# Altium PCB COIL-BOOST-10A.PcbDoc (part 5 of 5)
Units mm, origin at the board's own origin, x right, y up, seen from the top; angles counter-clockwise.
Board outline 80.1 x 100.1 mm, 4 copper layers (L1, L2, L3, L4), stack 1.512 mm thick; 282 components, 151 nets, 786 pads, 740 vias.
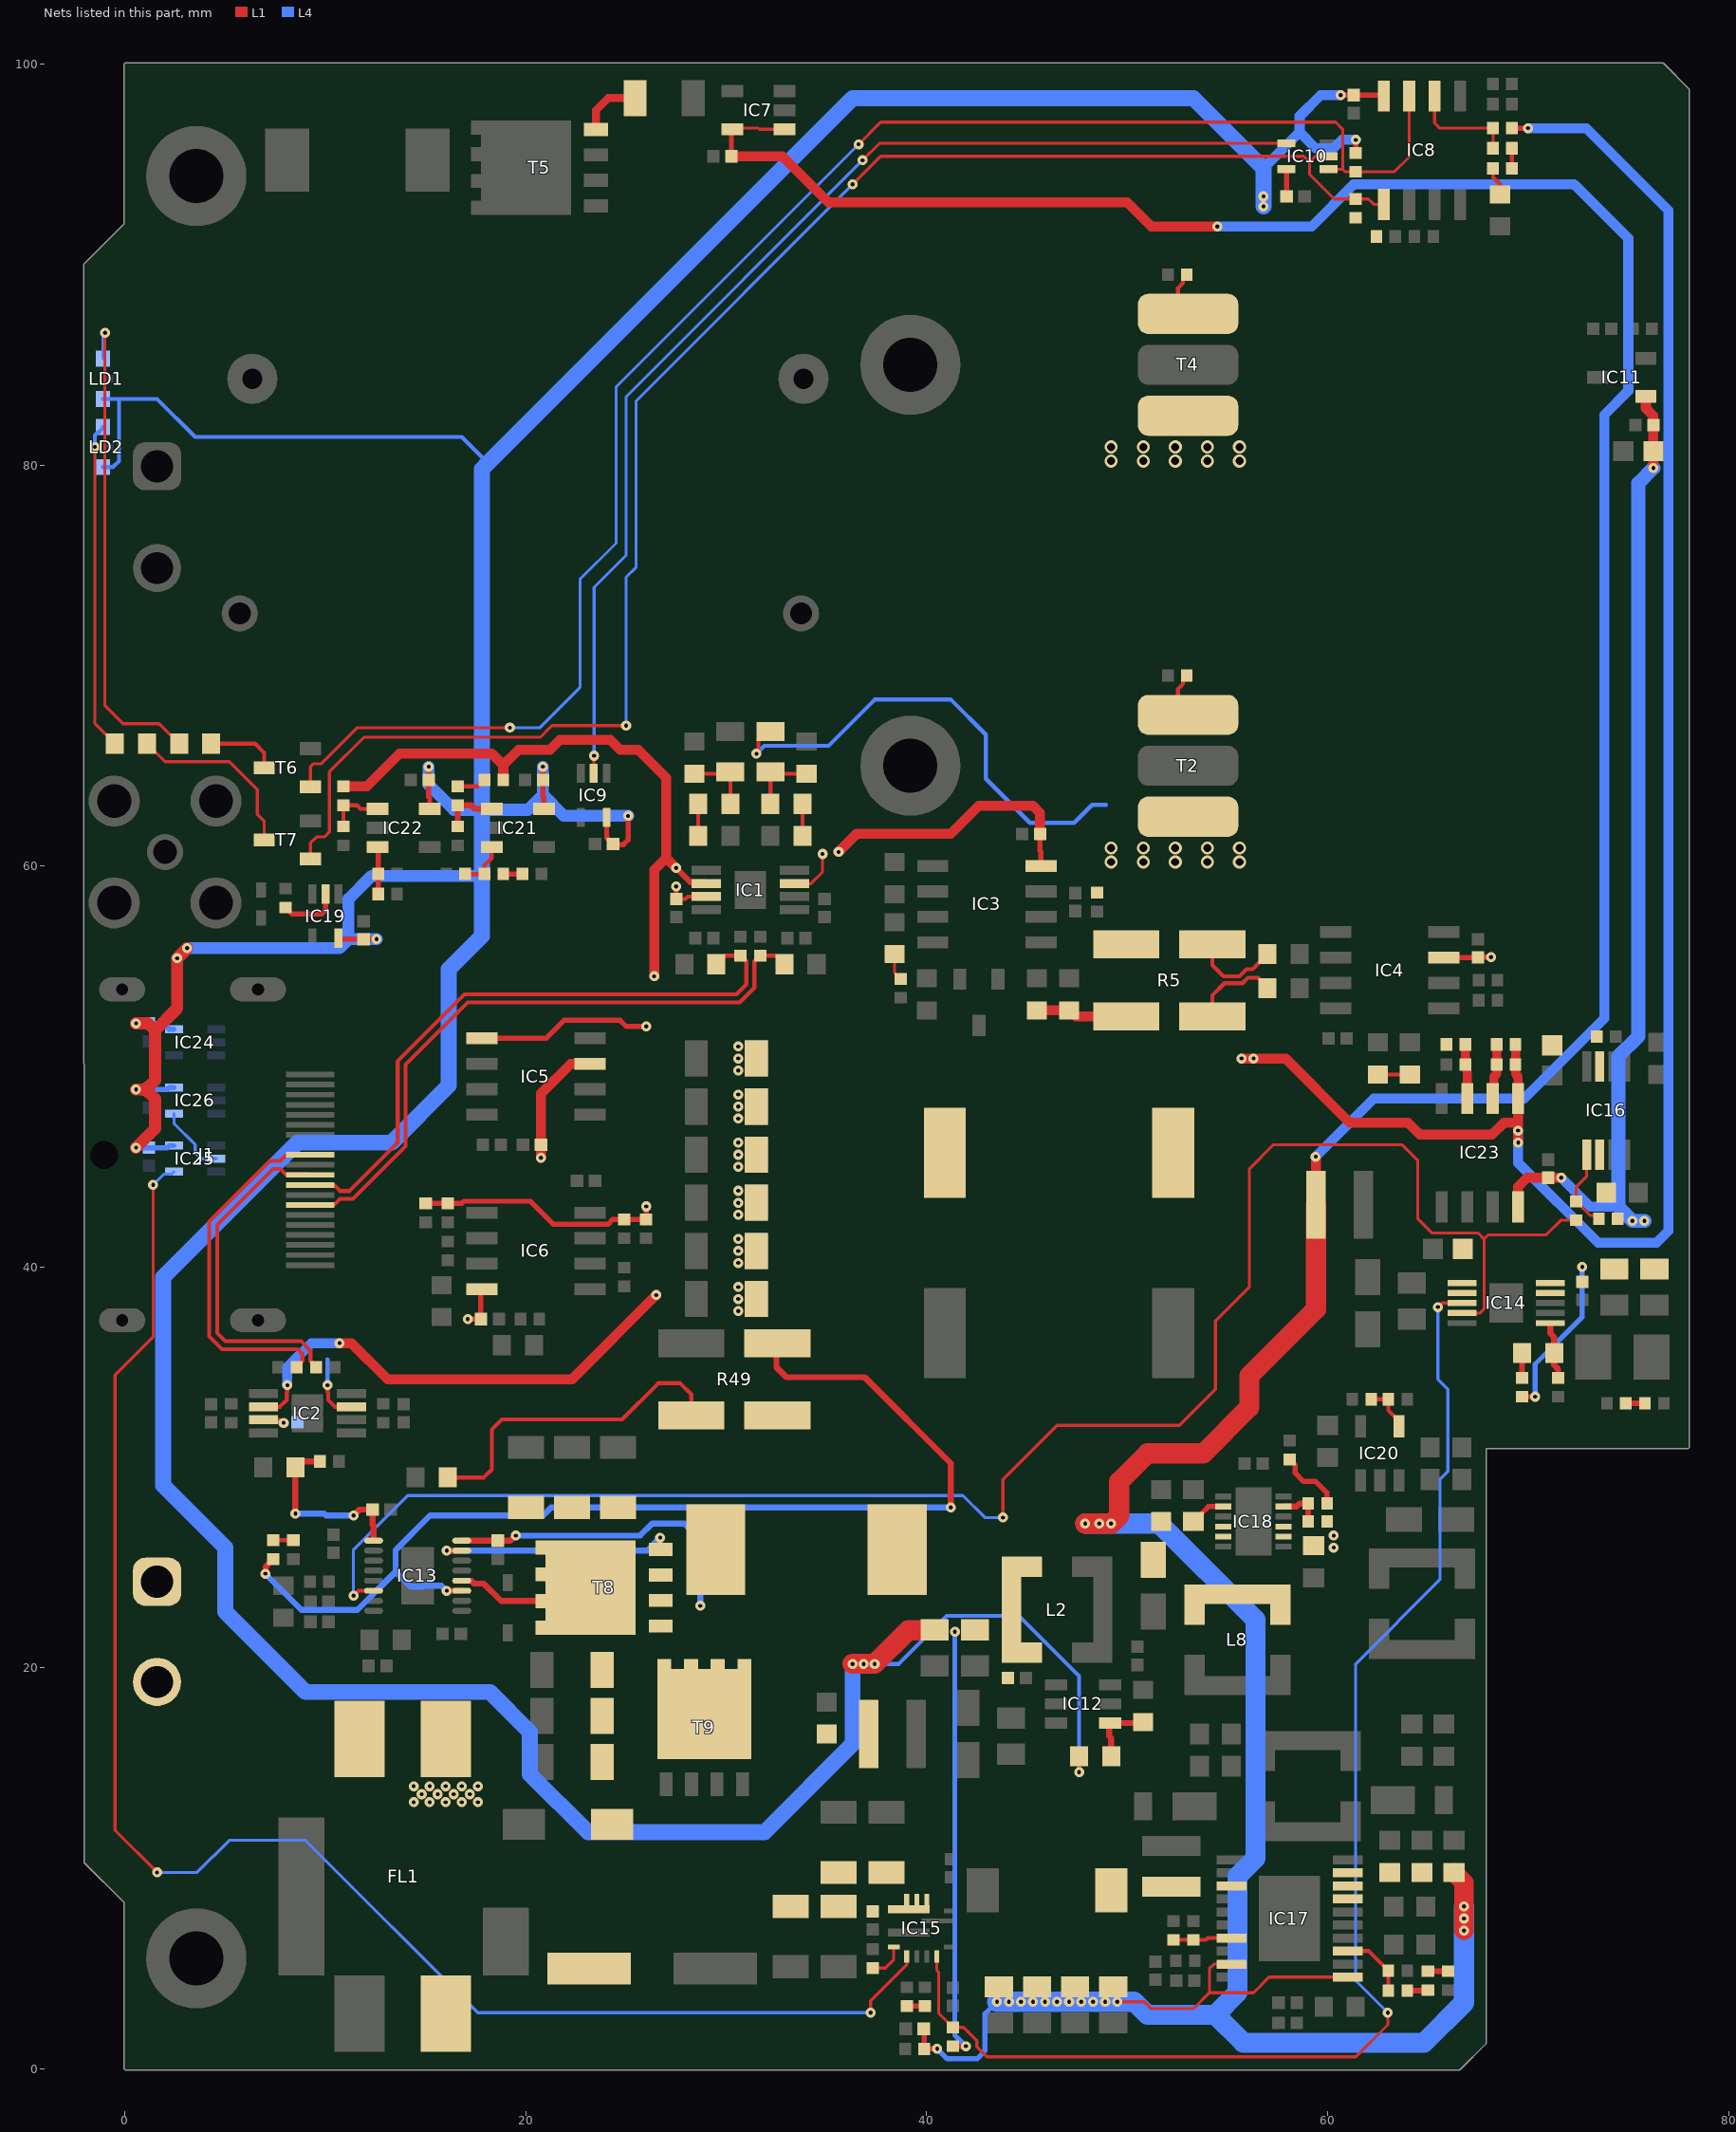
[diagram p5: the nets of this part, all layers, seen from the top]

## Via types
v1: diameter 0.5, hole 0.2, L1 to L4, tented both sides, 720 vias
v2: diameter 0.65, hole 0.4, L1 to L4, tented both sides, 20 vias

## Nets (pads, with @x,y where several pads share a name; then routed paths per layer and width w, separated by ;. In a path a pad name is that pad's centre, name@x,y a point inside that pad or via, vN(x,y) a via of type N, cw(c..) or ccw(c..) an arc to the next point about the centre after c; other vN are vias at no path point) (continued)
NetIC8_6: IC8.6 R32.1 R33.2 | length 5.4
  L1 w0.15: IC8.6@65.335,98.4 65.335,97.065 65.6,96.8 R32.1@68.25,96.8 R33.2@68.25,95.8
NetIC9_2: IC9.2 IC10.4 | length 57.6
  L1 w0.15: IC9.2@23.379,64.625 23.385,64.631 23.385,65.485 v1(23.4,65.5) ; v1(36.8,95.2) 37.65,96.05 IC10.4@57.95,96.05
  L4 w0.15: v1(23.4,65.5) 23.4,73.9 25,75.5 25,83.4 v1(36.8,95.2)
NetIC12_4: IC12.4 R46.1 R47.2 | length 3.4
  L1 w0.3: R46.1@49.2,15.6 49.2,16.5 49.1,16.6 49.1,17.2 IC12.4@49.15,17.25 50.75,17.25 R47.2@50.8,17.3
NetIC14_1: IC14.1 IC14.2 L4.2
NetIC14_6: IC14.6 R52.2 R53.1 | length 2.9
  L1 w0.3: IC14.6@71.1,37.2 71.1,36.7 71.3,36.5 R53.1@71.3,35.7 71.3,35.1 71.5,34.9 R52.2@71.5,34.47
NetIC15_10: IC15.10 R62.2 | length 1.9
  L1 w0.15: R62.2@37.3,5.03 37.93,5.03 38.35,5.45 IC15.10@38.35,6.08
NetIC16_1: IC16.1 R58.1 R60.2 | length 4
  L1 w0.15: R58.1@72.4,43.27 72.4,44 72.925,44.525 IC16.1@72.925,45.6 ; R58.1@72.42,43.27 72.635,43.055 72.635,43.035 73.103,42.567 73.363,42.567 R60.2@73.53,42.4
NetIC17_3: IC17.3 L7.1
NetIC17_7: IC17.7 R64.1 R69.2 | length 2.9
  L1 w0.2: R64.1@52.3,6.43 R69.2@53.3,6.43 53.93,6.43 54.025,6.525 IC17.7@55.2,6.525
NetIC17_13: IC17.13 R71.1 R72.1 | length 3.4
  L1 w0.2: IC17.13@61,5.875 62.055,5.875 62.82,5.11 62.84,5.11 63.03,4.92 R71.1@63.03,4.9 R72.1@63.03,3.9
NetIC18_5: IC18.5 R65.1 R70.2 | length 2.2
  L1 w0.3: IC18.5@57.8,28.05 58.45,28.05 58.6,28.2 R70.2@59.03,28.2 R65.1@59.03,27.3
NetIC19_2: IC19.2 R90.1 | length 3
  L1 w0.254: R90.1@8,57.93 8.02,57.93 8.183,57.767 8.183,57.749 8.332,57.6 9.8,57.6 10,57.8 IC19.2@10,58.6
NetIC20_4: IC20.4 R75.1 R76.2 | length 2.4
  L1 w0.2: R75.1@62.17,33.4 R76.2@63.03,33.4 63.03,32.845 63.55,32.325 IC20.4@63.55,32.05
NetIC21_1: IC21.1 R79.1 R80.2 | length 2.8
  L1 w0.3: R80.2@16.6,61.97 R79.1@16.6,63.03 17.27,63.03 17.45,62.85 IC21.1@18.3,62.85
NetIC21_3: IC21.3 R78.1 R91.2 | length 2.5
  L1 w0.2: R78.1@16.97,59.6 R91.2@17.93,59.6 17.93,60.03 18.3,60.4 IC21.3@18.3,60.95
NetIC22_1: IC22.1 R83.1 R84.2 | length 2.8
  L1 w0.2: R84.2@10.9,61.97 R83.1@10.9,63.03 11.57,63.03 11.75,62.85 IC22.1@12.6,62.85
NetIC22_3: IC22.3 R81.2 R82.1 | length 2.4
  L1 w0.25: IC22.3@12.6,60.95 12.63,60.92 R82.1@12.63,59.6 R81.2@12.63,58.6
NetIC23_2: IC23.2 R85.2 R86.2 | length 2.8
  L1 w0.45: IC23.2@68.235,48.4 68.3,48.465 68.3,49.5 68.43,49.63 R85.2@68.43,50.1 R86.2@68.43,51.1
NetIC23_3: IC23.3 R87.1 R89.2 | length 2.7
  L1 w0.45: R87.1@66.87,51.1 R89.2@66.87,50.1 66.935,50.035 66.935,49.781 66.965,49.751 IC23.3@66.965,48.4
NetIC25_2: IC25.2 IC26.4 | length 3.6
  L4 w0.15: IC26.4@2.45,47.65 2.45,47.15 3.5,46.1 3.5,45.7 3.8,45.4 IC25.2@4.55,45.4
NetL5_2: L5.2 R49.I2
NetLD1_1: LD1.1 R44.2 | length 24.5
  L1 w0.15: v1(-1,86.6) -1,68 -0.1,67.1 1.7,67.1 2.275,66.525 2.325,66.525 2.7,66.15 R44.2@2.7,66.1
  L4 w0.15: LD1.1@-1.1,85.3 -1.1,86.405 -1,86.505 v1(-1,86.6)
NetLD2_1: LD2.1 R45.2 | length 16.4
  L1 w0.15: v1(-1.5,80.9) -1.5,67.1 -0.925,66.525 -0.875,66.525 -0.5,66.15 R45.2@-0.5,66.1
  L4 w0.2: v1(-1.5,80.9) -1.5,81.483 -1.383,81.6 -1.35,81.6 -1.1,81.85 LD2.1@-1.1,81.9
NetR3_1: R3.1 R5.I2 R12.2 T2.3 T4.3 | length 24.3
  L1 w0.2: v1(31.5,65.6) 31.5,65.681 31.6,65.782 31.6,66.325 31.975,66.7 R3.1@32.2,66.7
  L4 w0.2: v1(31.5,65.6) 31.9,66 35.1,66 37.4,68.3 41.2,68.3 42.95,66.55 42.95,64.35 45.1,62.2 45.15,62.15 47.345,62.15 47.395,62.2 48.247,63.053 48.947,63.053
  other v2: 49.2,60.2 50.8,60.2 52.4,60.2 54,60.2 55.6,60.2 49.2,60.9 50.8,60.9 52.4,60.9 54,60.9 55.6,60.9 49.2,80.2 50.8,80.2 52.4,80.2 54,80.2 55.6,80.2 49.2,80.9 50.8,80.9 52.4,80.9 54,80.9 55.6,80.9
NetR3_2: R3.2 R15.2 R25.1 | length 3.4
  L1 w0.2: R25.1@32.2,63.1 R3.2@32.2,64.7 32.3,64.6 R15.2@34,64.6
NetR4_1: R4.1 R5.V2 | length 4.5
  L1 w0.2: R5.V2@54.25,56.1 54.25,55.05 54.8,54.5 55.6,54.5 55.95,54.85 56.25,54.85 56.6,55.2 56.65,55.2 57,55.55 R4.1@57,55.6
NetR5_V1: R5.V1 R10.1 | length 4.4
  L1 w0.2: R5.V1@54.25,52.5 54.25,53.55 54.85,54.15 55.75,54.15 56.02,54.42 56.53,54.42 56.65,54.3 57,53.95 R10.1@57,53.9
NetR6_1: R6.1 R8.1 | length 1.6
  L1 w0.2: R6.1@62.5,49.6 R8.1@64.1,49.6
NetR20_2: R20.2 T4.1 | length 2.8
  L1 w0.2: T4.1@51.354,87.54 51.667,87.54 52.537,88.41 52.537,88.837 52.78,89.08 52.78,89.31 R20.2@52.97,89.5
NetR22_2: R22.2 T2.1 | length 2.8
  L1 w0.2: T2.1@51.354,67.54 51.667,67.54 52.537,68.41 52.537,68.837 52.78,69.08 52.78,69.31 R22.2@52.97,69.5
NetR23_2: R23.2 R24.1 | length 1.4
  L1 w0.15: R24.1@38.4,55.6 38.4,54.67 38.465,54.605 38.465,54.585 38.68,54.37 R23.2@38.7,54.37
NetR25_2: R25.2 R57.1 | length 1.6
  L1 w0.2: R57.1@33.8,61.5 R25.2@33.8,63.1
NetR33_1: R33.1 R34.2 | length 1
  L1 w0.2: R34.2@69.19,94.8 R33.1@69.19,95.8
NetR34_1: R34.1 R37.2 | length 1.4
  L1 w0.2: R34.1@68.25,94.8 68.25,94.35 68.6,94 R37.2@68.6,93.5
NetR36_2: R36.2 T5.4 | length 3.2
  L1 w0.4: T5.4@23.5,96.74 23.5,97.7 24.1,98.3 R36.2@25.45,98.3
NetR44_1: R44.1 T6.3 | length 3.6
  L1 w0.2: R44.1@4.3,66.1 6.5,66.1 6.95,65.65 T6.3@6.95,64.9
NetR45_1: R45.1 T7.3 | length 9.1
  L1 w0.15: R45.1@1.1,66.1 1.1,66.05 1.475,65.675 1.525,65.675 2,65.2 5.2,65.2 6.6,63.8 6.6,62.575 6.95,62.225 T7.3@6.95,61.3
NetR49_V2: R49.V2 R55.2 | length 16.5
  L1 w0.2: R55.2@16.1,29.5 17.9,29.5 18.3,29.9 18.3,31.9 18.8,32.4 24.8,32.4 26.6,34.2 27.7,34.2 28.25,33.65 R49.V2@28.25,32.6
NetR50_2: R50.2 R51.1 | length 1
  L1 w0.3: R50.2@74.87,33.2 R51.1@75.83,33.2
NetR53_2: R53.2 R54.1 | length 1.2
  L1 w0.3: R54.1@69.7,34.47 R53.2@69.7,35.7
NetR61_1: R61.1 R63.2 | length 0.9
  L1 w0.254: R61.1@39,3.13 R63.2@39.9,3.13
NetR70_1: R70.1 R93.2 | length 3.3
  L1 w0.254: R93.2@58.1,30.4 58.382,30.118 58.382,29.718 58.8,29.3 59.4,29.3 59.97,28.73 R70.1@59.97,28.2
NetR72_2: R72.2 R73.2 | length 0.9
  L1 w0.3: R72.2@64.07,3.9 64.97,3.9 R73.2@65,3.93
NetR73_1: R73.1 R74.2 | length 1
  L1 w0.3: R73.1@65,4.87 R74.2@66,4.87
NetR77_2: R77.2 R91.1 | length 1
  L1 w0.25: R91.1@18.87,59.6 R77.2@19.83,59.6
NetR79_2: R79.2 R92.1 | length 1.5
  L1 w0.2: R79.2@16.6,63.97 17.6,63.97 17.72,64.09 17.74,64.09 17.93,64.28 R92.1@17.93,64.3
NetR94_1: R94.1 R96.2 R97.2 | length 3.4
  L1 w0.2: R97.2@28.4,64.6 30.1,64.6 R96.2@30.2,64.7 R94.1@30.2,63.1
NetR94_2: R94.2 R95.1 | length 1.6
  L1 w0.2: R95.1@28.6,61.5 R94.2@28.6,63.1
NetR106_2: R106.2 R107.1 | length 1
  L1 w0.2: R107.1@7.4,26.37 R106.2@8.4,26.37
OCP: IC8.7 IC10.1 R35.1 T6.1 | length 83.1
  L1 w0.15: T6.1@9.25,63.95 9.25,64.95 9.4,65.1 9.8,65.1 11.6,66.9 v1(19.2,66.9) ; v1(36.6,96) 37.7,97.1 60.4,97.1 60.75,96.75 60.75,94.75 ; IC10.1@60.05,94.75 60.75,94.75 ; IC8.7@64.065,98.4 64.065,95.365 63.33,94.63 R35.1@61.4,94.63 60.87,94.63 60.8,94.7 60.75,94.75
  L4 w0.15: v1(19.2,66.9) 20.7,66.9 22.7,68.9 22.7,74.3 24.5,76.1 24.5,83.9 v1(36.6,96)
OVERTEMP: IC8.1 IC10.2 R42.1 T7.1 | length 81.9
  L1 w0.15: T7.1@9.25,60.35 9.25,61.15 9.55,61.45 9.95,61.45 10.2,61.7 10.2,64.7 11.925,66.425 20.725,66.425 21.3,67 v1(25,67) ; v1(36.3,94) 37.7,95.4 58.8,95.4 59.1,95.1 ; IC10.2@60.05,95.4 59.4,95.4 59.1,95.1 ; IC8.1@62.795,93 62.3,93 62.03,93.27 R42.1@61.4,93.27 60.33,93.27 59.1,94.5 59.1,95.1
  L4 w0.15: v1(25,67) 25,74.4 25.5,74.9 25.5,83.2 v1(36.3,94)
P2V5_REF: IC1.2 IC2.2 IC5.1 IC23.1 R11.1 R14.1 R29.1 R31.1 R32.2 R83.2 R85.1 R86.1 R92.2 | length 169
  L1 w0.2: IC2.2@6.9,33.025 7.725,33.025 8.065,33.365 8.065,33.749 8.1,33.784 v1(8.1,34.1)
  L1 w0.254: R29.1@15,43.17 R31.1@16.1,43.17 16.798,43.17 16.91,43.282 20.218,43.282 21.372,42.128 24.09,42.128 24.332,42.37 R14.1@24.9,42.37 R11.1@26,42.37 v1(26,43.02) ; IC5.1@17.8,51.405 21.005,51.405 21.9,52.3 24.7,52.3 25,52 v1(26,52) ; R32.2@69.19,96.8 v1(70,96.8)
  L1 w0.3: v1(27.5,59.9) 28.2,59.2 28.925,59.2 IC1.2@29,59.125
  L1 w0.45: R86.1@69.37,51.1 R85.1@69.37,50.1 69.37,49.63 69.505,49.495 IC23.1@69.505,48.4
  L1 w0.5: v1(10.7,36.2) 11.3,36.2 13.1,34.4 22.3,34.4 v1(26.5,38.6) ; R83.2@10.9,63.97 12.07,63.97 13.7,65.6 18.3,65.6 18.87,65.03 ; R92.2@18.87,64.3 18.87,65.03 ; v1(26.4,54.5) 26.4,59.8 27,60.4 ; v1(27.5,59.9) 27,60.4 ; v1(55.7,50.4) 57.9,50.4 61.1,47.2 64,47.2 64.6,46.6 68.2,46.6 68.8,47.2 69.505,47.2 ; v1(69.505,46.205) 69.505,46.795 v1(69.5,46.8) 69.505,46.805 69.505,47.2 ; IC23.1@69.505,48.4 69.505,47.2 ; 18.87,65.03 19.64,65.8 21.2,65.8 21.7,66.3 24.2,66.3 24.7,65.8 25.6,65.8 27,64.4 27,60.4
  L4 w0.5: v1(8.1,34.1) 8.1,35 9.3,36.2 v1(10.7,36.2) ; v1@69.505,46.8 v1(69.505,46.205) 69.505,45.195 73.5,41.2 76.4,41.2 77,41.8 77,92.7 72.9,96.8 v1(70,96.8)
  other v1: 56.3,50.4
P3V3: C9.2 C24.2 C25.2 C26.2 C40.2 C48.2 C56.2 C98.2 C99.2 C100.2 C101.2 C104.2 IC8.8 IC9.5 IC10.5 IC19.5 IC21.5 IC22.5 IC24.5 IC25.5 IC26.5 L2.2 LD1.2 LD2.2 R35.2 R40.2 R42.2 R46.2 R88.2 | length 304.4
  L1 w0.2: v1(47.6,14.8) R46.2@47.6,15.6
  L1 w0.254: IC19.5@10.65,56.4 10.7,56.35 C48.2@11.9,56.35 v1(12.55,56.35) ; v1(15.15,64.95) 15.15,63.45 15.2,63.4 IC22.5@15.2,62.85 ; v1(20.85,64.95) C98.2@20.85,64.3 20.85,63.45 20.9,63.4 IC21.5@20.9,62.85 ; IC9.5@24.029,62.425 24.029,61.533 24.037,61.525 24.037,61.413 24.384,61.066 24.866,61.066 25.1,61.3 v1(25.1,62.5) ; R88.2@41.3,1.13 v1(41.95,1.13) ; C99.2@57.95,93.4 IC10.5@57.95,94.75 ; v1(60.65,98.45) C100.2@61.3,98.45 62.745,98.45 IC8.8@62.795,98.4 ; R35.2@61.4,95.57 v1(61.4,96.22)
  L1 w0.6: v1(0.55,45.95) 1.5,46.9 1.5,48.39 1.04,48.85 ; v1(0.55,48.85) 1.04,48.85 ; v1(0.55,52.15) 1.149,52.15 1.5,51.799 ; v1(3.1,55.9) v1(2.6,55.4) 2.6,52.899 1.5,51.799 ; 1.04,48.85 1.5,49.31 1.5,51.799
  L1 w1: v1(36.3,20.2) v1(36.85,20.2) v1(37.4,20.2) 39.075,21.875 40.375,21.875 C25.2@40.4,21.9
  L4 w0.2: LD2.2@-1.1,79.9 -0.6,79.9 -0.3,80.2 -0.3,83.3 ; LD1.2@-1.1,83.3 -0.3,83.3 ; 18.1,80.1 16.8,81.4 3.5,81.4 1.6,83.3 -0.3,83.3 ; v1(37.4,20.2) 38.6,20.2 41,22.6 44.6,22.6 47.6,19.6 v1(47.6,14.8)
  L4 w0.254: v1(0.55,45.95) 2.1,45.95 2.2,46.05 IC25.5@2.45,46.05 ; v1(0.55,48.85) C104.2@1.2,48.85 2.1,48.85 2.2,48.95 IC26.5@2.45,48.95 ; v1(0.55,52.15) C40.2@1.2,52.15 1.978,52.15 2.127,52.001 2.127,51.923 2.2,51.85 IC24.5@2.45,51.85 ; v1(41.4,21.8) 41.4,1.68 v1(41.95,1.13)
  L4 w0.5: 56.8,94.8 58.6,96.6 ; v1(60.65,98.45) 59.65,98.45 58.6,97.4 58.6,96.6 ; v1(61.4,96.22) 60.72,96.22 60.3,95.8 59.4,95.8 58.6,96.6
  L4 w0.6: v1(2.6,55.4) v1(3.1,55.9) 10.7,55.9 11.15,56.35 ; v1(12.55,56.35) 11.15,56.35 ; v1(15.15,64.95) 15.15,64.05 16.4,62.8 17.8,62.8 20.1,62.8 20.85,63.55 ; 17.8,59.5 12.3,59.5 11.15,58.35 11.15,56.35 ; v1(20.85,64.95) 20.85,63.55 ; v1(25.1,62.5) 21.9,62.5 20.85,63.55
  L4 w0.8: v1(36.3,20.2) 36.3,16.2 31.9,11.8 23.1,11.8 20.2,14.7 20.2,16.8 18.2,18.8 9,18.8 5,22.8 5,26 1.9,29.1 1.9,39.5 8.6,46.2 13.3,46.2 16.15,49.05 16.15,54.85 17.8,56.5 17.8,59.5 17.8,62.8 17.8,79.8 18.1,80.1 36.3,98.3 53.3,98.3 56.8,94.8 v1(56.8,93.4) v1(56.8,92.9)
P5V0_REF: C77.2 IC16.7 R66.2 R87.2
P5V4_PG: IC13.6 IC14.4 R58.2 | length 89
  L1 w0.15: v1(43.8,27.5) 43.8,29.4 46.5,32.1 52.6,32.1 54.4,33.9 54.4,37.3 56.1,39 56.1,44.9 57.3,46.1 63.7,46.1 64.5,45.3 64.5,42.4 65.2,41.7 67.5,41.7 67.8,41.4 ; IC14.4@66.7,37.7 67.6,37.7 67.8,37.9 67.8,41.4 ; R58.2@72.4,42.33 71.63,42.33 70.9,41.6 68,41.6 67.8,41.4
  L1 w0.2: v1(11.4,23.6) 11.65,23.85 IC13.6@12.4,23.85
  L4 w0.15: v1(11.4,23.6) 11.4,25.9 14.1,28.6 41.8,28.6 42.9,27.5 v1(43.8,27.5)
P5V4A: C10.2 C11.2 C29.2 C30.2 C31.2 C68.2 C102.2 IC11.1 IC14.9 IC14.10 IC16.2 IC23.8 R54.2 R60.1 | length 57.8
  L1 w0.254: R54.2@69.7,33.53 v1(70.35,33.53)
  L1 w0.5: IC23.8@69.505,43 69.505,44.005 69.95,44.45 C102.2@71,44.45 v1(71.65,44.45) ; IC11.1@75.875,83.421 75.875,82.825 76.25,82.45 C11.2@76.25,82 C10.2@76.25,80.7 v1(76.25,79.85)
  L4 w0.254: v1(70.35,33.53) 70.35,35.15 72.7,37.5 v1(72.7,40)
  L4 w0.5: v1(71.65,44.45) 73.1,43 74.5,43
  L4 w0.7: v1(75.8,42.3) v1(75.2,42.3) 74.5,43 74.5,50.5 75.5,51.5 75.5,79.1 v1(76.25,79.85)
P12V0: C8.2 C63.2 C64.2 C65.2 C66.2 C67.2 C91.2 C92.2 C93.2 IC7.1 IC7.5 IC17.9 IC17.11 IC17.17 IC17.18 IC17.19 L3.1 L6.2 R59.2 | length 220
  L1 w0.15: IC7.5@30.35,96.8 31.6,96.8 31.65,96.75 IC7.1@32.9,96.75 ; v1(49.5,3.35) 50.85,3.35 51.2,3 53.3,3 54.1,3.8 ; IC17.9@55.2,5.225 54.325,5.225 54.1,5 54.1,3.8 ; IC17.11@61,4.575 57.075,4.575 56.288,3.788 56.275,3.8 54.1,3.8
  L1 w0.254: C8.2@30.25,95.4 30.25,96.7 IC7.5@30.3,96.75 ; C67.2@39.85,2 39.87,1.98 R59.2@39.87,1 v1(40.52,1)
  L1 w0.5: C8.2@30.25,95.4 32.8,95.4 34.9,93.3 35.1,93.1 50,93.1 51.2,91.9 v1(54.5,91.9) ; v1(59.4,45.5) 59.415,45.485 L3.1@59.415,43.1
  L1 w0.95: C91.2@66.3,9.8 66.8,9.3 v1(66.8,8.1) v1(66.8,7.5) v1@66.8,6.9
  L1 w1: v1(47.9,27.2) v1(48.6,27.2) v1(49.2,27.2) 49.6,27.6 49.6,29.3 51,30.7 53.8,30.7 56.1,33 56.1,34.575 59.415,37.89 L3.1@59.415,43.1
  L4 w0.254: v1(40.52,1) 41.02,0.5 42.5,0.5 42.9,0.9 42.9,2.75 v1(43.5,3.35)
  L4 w0.5: v1(54.5,91.9) 59.2,91.9 61.3,94 72.3,94 75,91.3 75,83.7 73.8,82.5 73.8,52.4 69.8,48.4 62.3,48.4 v1(59.4,45.5)
  L4 w1: v1(43.5,3.35) v1(44.1,3.35) v1(44.7,3.35) v1(45.3,3.35) v1(45.9,3.35) v1(46.5,3.35) v1(47.1,3.35) v1(47.7,3.35) v1(48.3,3.35) v1(48.9,3.35) v1(49.5,3.35) 50.35,3.35 51,2.7 54.4,2.7 ; v1(47.9,27.2) v1(48.6,27.2) v1(49.2,27.2) 51.6,27.2 56.4,22.4 56.4,10.5 55.5,9.6 55.5,3.8 54.4,2.7 ; v1(66.8,8.1) v1(66.8,7.5) 66.8,3.3 64.8,1.3 55.8,1.3 54.4,2.7
  other v1: 66.804,6.9
P12V0_PG: IC14.3 IC15.4 R88.1 | length 66.9
  L1 w0.15: IC15.4@40.5,5.61 40.5,4.9 40.6,4.8 40.6,2.77 41.065,2.305 41.065,2.285 41.28,2.07 R88.1@41.3,2.07 41.83,2.07 42.5,1.4 42.5,1.1 43,0.6 61.4,0.6 63,2.2 v1(63,2.8) ; v1(65.5,38) 65.7,38.2 IC14.3@66.7,38.2
  L4 w0.15: v1(63,2.8) 61.4,4.4 61.4,20.2 65.6,24.4 65.6,29.4 66,29.8 66,33.9 65.5,34.4 v1(65.5,38)
P15V0: C2.2 C5.2 C75.2 C94.2 C96.2 C103.2 C107.2 IC1.3 IC1.7 IC2.3 IC2.7 IC3.8 IC4.7 IC5.7 IC6.8 IC18.2 IC18.3 R65.2 | length 33.8
  L1 w0.15: IC1.7@33.4,59.125 34.225,59.125 34.8,59.7 v1(34.8,60.6)
  L1 w0.2: IC2.3@6.9,32.375 7.725,32.375 7.875,32.225 v1(7.915,32.225) ; v1(10.1,34.1) 10.1,33.784 10.135,33.749 10.135,33.365 10.475,33.025 IC2.7@11.3,33.025 ; v1(27.5,58.98) C103.2@27.5,58.35 27.95,58.35 28.075,58.475 IC1.3@29,58.475
  L1 w0.254: v1(17.1,37.4) C94.2@17.75,37.4 17.75,38.845 IC6.8@17.8,38.895 ; C5.2@45.65,61.6 45.65,60.75 45.7,60.7 IC3.8@45.7,60.005 ; IC4.7@65.8,55.435 67.485,55.435 C2.2@67.5,55.45 v1(68.15,55.45)
  L1 w0.5: v1(20.75,45.45) C96.2@20.75,46.1 20.75,48.65 22.235,50.135 IC5.7@23.2,50.135 ; v1(35.6,60.7) 36.5,61.6 41.2,61.6 42.6,63 45.3,63 45.65,62.65 C5.2@45.65,61.6
  L4 w0.2: v1(10.1,34.1) 10.1,35.4
  other v1: 60.3,26 60.3,26.6
P16V0: C70.1 C71.2 C74.2 IC18.8 IC18.10 IC18.11 L8.2 | length 1.8
  L1 w0.254: C74.2@53.3,27.3 53.35,27.3 53.698,27.648 53.698,27.698 54.05,28.05 IC18.8@54.8,28.05
POWER_IN: C12.1 C15.2 C18.2 C19.2 C20.2 C21.2 C22.2 C23.2 C58.2 C59.2 C60.2 C61.2 C62.1 D5.1 FL1.2 IC13.12 IC15.8 L1.1 T8.D | length 4.7
  L1 w0.3: IC13.12@16.8,24.35 17.272,24.35 17.416,24.206 17.894,24.206 18.765,23.335 T8.D@21.075,23.335
SUPPLY_EN: IC15.1 IC25.4 | length 80.7
  L1 w0.15: v1(1.4,44.1) 1.4,36.5 -0.5,34.6 -0.5,11.9 v1(1.6,9.8) ; v1(37.2,2.8) 37.2,3.4 39,5.2 IC15.1@39,5.61
  L4 w0.15: v1(1.4,44.1) 1.925,44.625 2.325,44.625 IC25.4@2.45,44.75 ; v1(1.6,9.8) 3.6,9.8 5.2,11.4 9,11.4 17.6,2.8 v1(37.2,2.8)
SW: C32.1 IC13.16 L5.1 T8.1 T8.2 T8.3 T9.D | length 15.9
  L1 w0.3: IC13.16@16.8,26.35 C32.1@18.6,26.35 19.224,26.35 19.474,26.6 v1(19.5,26.6)
  L4 w0.3: v1(19.5,26.6) 25.7,26.6 26.3,27.2 27.9,27.2 28.7,26.4 v1(28.7,23.1)
TG: IC13.15 T8.4 | length 12.3
  L1 w0.3: v1(16.05,25.85) IC13.15@16.8,25.85 ; v1(26.7,26.5) 26.7,25.93 T8.4@26.725,25.905
  L4 w0.3: v1(16.05,25.85) 26.05,25.85 v1(26.7,26.5)
V_SENSE_N: J1.7 R1.2 R17.2 | length 32.2
  L1 w0.2: J1.7@9.237,43.093 9.277,43.133 10.471,43.133 10.731,43.393 11.366,43.393 14,46.027 14,50.1 17.1,53.2 30.666,53.2 31.4,53.934 31.4,55.25 31.68,55.53 R1.2@31.7,55.53 32.433,55.53 32.463,55.5 32.55,55.5 32.9,55.15 R17.2@32.9,55.1
V_SENSE_P: J1.9 R98.2 R99.2 | length 31.5
  L1 w0.2: J1.9@9.237,44.093 9.277,44.053 10.471,44.053 10.731,43.793 11.2,43.793 13.6,46.193 13.6,50.266 16.934,53.6 30.5,53.6 31,54.1 31,55.25 30.72,55.53 R99.2@30.7,55.53 ; R98.2@29.509,55.1 29.509,55.159 29.85,55.5 29.937,55.5 29.967,55.53 R99.2@30.68,55.53
V_TRACK: C42.2 IC13.1 R109.2 R110.2 | length 9.2
  L1 w0.3: v1(8.5,27.7) R109.2@8.5,30 8.8,30.3 R110.2@9.73,30.3 ; v1(11.4,27.6) 11.7,27.9 C42.2@12.35,27.9 12.35,27.15 12.4,27.1 IC13.1@12.4,26.35
  L4 w0.3: v1(8.5,27.7) 9.927,27.7 10.027,27.6 v1(11.4,27.6)
V_TRACK_N: J1.12 R103.1 | length 17.9
  L1 w0.2: R103.1@8.57,35 8.57,35.02 8.85,35.3 8.85,35.666 8.616,35.9 4.834,35.9 4.2,36.534 4.2,42.266 7.227,45.293 7.743,45.293 8.003,45.553 9.197,45.553 J1.12@9.237,45.593
V_TRACK_P: J1.10 R102.1 | length 17.3
  L1 w0.2: J1.10@9.237,44.593 9.197,44.633 8.003,44.633 7.743,44.893 7.393,44.893 4.6,42.1 4.6,36.7 5,36.3 8.781,36.3 9.25,35.831 9.25,35.3 9.53,35.02 R102.1@9.53,35
VBUCK: C34.1 C35.1 C36.2 C37.2 C38.2 C39.2 C44.2 C45.2 C46.2 C47.2 C52.2 C53.2 C54.2 C55.2 IC13.11 R5.I1 R18.2 R19.2 R49.I1 R107.2 | length 61
  L1 w0.3: v1(7,24.7) 7.03,24.73 7.03,25.06 7.24,25.27 7.24,25.29 7.38,25.43 R107.2@7.4,25.43 ; v1(16.05,23.85) IC13.11@16.8,23.85 ; R49.I1@32.55,36.2 32.5,36.15 32.5,35 33,34.5 36.9,34.5 41.2,30.2 v1(41.2,28)
  L1 w0.5: R19.2@45.5,52.8 R18.2@47.1,52.8 ; R18.2@47.15,52.8 47.45,52.5 R5.I1@49.95,52.5
  L4 w0.3: v1(7,24.7) 8.8,22.9 11.6,22.9 13.5,24.8 ; v1(16.05,23.85) 16.024,23.85 15.774,24.1 14.878,24.1 14.828,24.05 14.25,24.05 13.5,24.8 ; v1(41.2,28) 21.261,28 20.861,27.6 15.222,27.6 13.5,25.878 13.5,24.8
  other v1: 30.6,37.8 30.6,38.4 30.6,39 30.6,40.2 30.6,40.8 30.6,41.4 30.6,42.6 30.6,43.2 30.6,43.8 30.6,45 30.6,45.6 30.6,46.2 30.6,47.4 30.6,48 30.6,48.6 30.6,49.8 30.6,50.4 30.6,51
VIN+: FL1.1 P1.1
  other v1: 14.4,13.3 15.2,13.3 16,13.3 16.8,13.3 17.6,13.3 14.8,13.7 15.6,13.7 16.4,13.7 17.2,13.7 14.4,14.1 15.2,14.1 16,14.1 16.8,14.1 17.6,14.1
VIN-: FL1.3 P1.2
pads on no net: B6.1 B8.1 IC5.8 IC9.1 IC12.5 IC17.10 IC18.1 IC18.4 IC18.9 IC18.12 IC19.1 IC23.5 IC23.6 IC23.7 IC26.1 J1.14 J1.MTG1 LD1.3 LD2.3

## Polygon pours and split planes (outlines as drawn)
no net on L1 "BALANCE" (solid, pour order 80): -2.036,10.284 -0.05,8.299 -0.05,0 0,-0.05 29.182,-0.05 66.577,-0.05 66.612,-0.036 67.906,1.258 67.92,1.293 67.92,30.95 78,30.95 78.05,31 78.05,98.724 78.036,98.76 76.76,100.035 76.725,100.05 29.182,100.05 0.001,100.05 -0.05,100 -0.05,92.021 -2.036,90.036 -2.05,90
P3V3 on L1 "P3V3_L01_P094" (solid, pour order 94): 58.26,92.54 58.5,92.3 60.2,92.3 60.52,92.62 61.71,92.62 61.71,92.04 62.04,91.71 62.72,91.71 62.72,91.09 56.61,91.09 56,91.7 56,93.4 56.31,93.71 58.26,93.71
GND on L1 "GND_L01_P093" (solid, pour order 93): 41.95,38.95 39.35,38.95 39.1,38.7 39.1,34.8 39.45,34.45 41.95,34.45
GND on L1 "GND_L01_P092" (solid, pour order 92): 53.35,38.95 50.75,38.95 50.5,38.7 50.5,34.8 50.85,34.45 53.35,34.45
NetR3_1 on L1 "NETR3_1_L01_P091" (solid, pour order 91): 48.854,82.154 48.854,79.846 49.2,79.5 55.7,79.5 56,79.8 56,82.704 55.244,83.46 50.16,83.46
I_OUT_P on L1 "I_OUT_P_L01_P081" (solid, pour order 81): 55.418,83.8 55.75,84.132 55.75,85.95 55.4,86.3 50.3,86.3 45.5,91.1 27.5,91.1 13.4,77 0,77 -0.5,76.5 -0.5,68.5 0.5,67.5 27,67.5 27.605,68.105 40.895,68.105 45.2,63.8 55.2,63.8 55.537,64.137 55.537,65.022 55.537,65.863 55.2,66.2 50.6,66.2 47.7,69.1 47.7,70.5 48.571,71.371 48.571,82.304 50.067,83.8
NetR3_1 on L1 "NETR3_1_L01_P001" (solid, pour order 1): 48.19,58.38 48.92,58.38 49.1,58.2 49.1,57.4 48.8,57.1 48.6,57.1 48.3,56.8 48.3,55.4 51.6,55.4 51.6,56.8 52.4,57.6 55.3,57.6 56,58.3 56,62.704 55.244,63.46 50.16,63.46 48.19,61.49 48.19,58.96
GND on L1 "L1-GND" (solid, pour order 51): 70.15,38.05 73,38.05 73.475,37.575 75,37.575 75.25,37.325 75.25,34.375 75.825,34.375 76.48,33.72 76.48,32.89 77.06,32.89 77.06,38.565 76.965,38.66 72.39,38.66 72.08,38.35 70.15,38.35 69.74,38.76 69.74,39.19 68.06,39.19 68.06,37.66 67.75,37.35 65.15,37.35 64.9,37.6 64.9,37.925 61.5,37.925 61.375,37.8 61.375,36 68.1,36 68.7,36.6 69.13,36.6 69.74,37.21 69.74,37.64
POWER_IN on L1 "L1-POWER_IN" (solid, pour order 89): 26.2,6.775 26.965,7.54 37.83,7.54 38.05,7.76 40.15,7.76 40.15,9.65 39.425,10.375 34.7,10.375 34.4,10.675 34.4,13.8 35.6,15 37.59,15 37.59,18.4 36.61,18.4 36.61,17.71 36.075,17.175 33.575,17.175 33,16.6 33,15.6 32.7,15.3 32.7,14 30.7,12 26.7,12 25.5,13.2 25.5,20.375 25.5,27.425 25.5,28.575 25.175,28.9 19.425,28.9 19.1,28.575 19.1,27.425 20,27.425 20.475,26.95 20.475,21.65 21.212,21.65 21.75,21.65 22.6,20.8 22.6,11.5 21.8,10.7 16.8,10.7 14.75,8.65 14.75,0.85 25.75,0.85 25.8,0.9 26.2,1.3
GND on L1 "GND_L01_P088" (solid, pour order 88): 9.95,4.65 9.95,12.55 7.35,12.55 7,12.2 7,5 7.35,4.65
GND on L1 "GND_L01_P085" (solid, pour order 85): 10.45,0.85 10.45,5.15 10.6,5.3 12.8,5.3 12.95,5.15 12.95,0.85
GND on L1 "GND_L01_P084" (solid, pour order 84): 17.85,8.527 18.011,8.688 19.944,8.688 20.15,8.483 20.15,4.173 19.988,4.012 18.012,4.012 17.85,4.173
GND on L1 "GND_L01_P083" (solid, pour order 83): 51.925,21.9 50.2,21.9 50,22.1 50,23.5 50.2,23.7 51.925,23.7
I_OUT_N on L1 "I_OUT_N_L01_P082" (solid, pour order 82): 6.7,92.2 10.1,92.2 12.9,95 12.9,96.4 13.685,97.185 22.25,97.185 22.25,87.35 12.9,78 0,78 -0.5,78.5 -0.5,85
GND on L1 "L1-GND 2" (solid, pour order 75): 27.925,51.3 29.6,51.3 29.7,51.2 29.7,44 29.7,42.4 29.7,39.2 29.7,37.6 29.6,37.5 27.925,37.5 27.925,42.3
GND on L1 "GND_L01_P074" (solid, pour order 74): 21.025,11.425 21.2,11.6 21.2,13.5 21,13.7 18.8,13.7 18.6,13.5 18.6,11.6 18.775,11.425
GND on L1 "GND_L01_P069" (solid, pour order 69): 26.67,14.8 29.86,14.8 29.86,12.66 29.7,12.5 26.9,12.5 26.67,12.73
P3V3 on L1 "P3V3_L01_P067" (solid, pour order 67): 39.7,22.425 39.7,21.375 43.1,21.375 43.75,20.725 43.75,20.25 43.74,19.19 44.36,19.19 44.36,19.81 44.8,20.25 45.75,20.25 45.75,21.263 45.75,21.264 44.7,21.264 44.7,24.536 45.75,24.536 45.75,25.55 43.75,25.55 43.75,23.075 43.1,22.425
GND on L1 "GND_L01_P066" (solid, pour order 66): 44.35,18.9 43.95,18.9 43.5,18.9 43.1,19.3 43.1,20.625 39.7,20.625 39.7,19.575 40.4,19.575 41.375,18.6 41.375,17.1 41.5,16.975 45.075,16.975 45.4,17.3 45.4,18.5 45.775,18.875 47,18.875 47,19.425 46.615,19.81 44.64,19.81 44.64,19.19
NetC14_1 on L1 "NETC14_1_L01_P063" (solid, pour order 63): 49.5,20 49.5,19.775 49.15,19.425 48.6,19.425 48.6,18.875 49.7,18.875 49.9,19.075 49.9,19.4 50.34,19.84 50.81,19.84 50.81,20.46 49.96,20.46
NetC14_2 on L1 "NETC14_2_L01_P062" (solid, pour order 62): 45.9,17.925 47.925,17.925 48.2,18.2 48.2,19.6 48.85,20.25 49.25,20.25 49.74,20.74 50.81,20.74 50.81,21.36 50.19,21.36 49.25,22.3 49.25,25.55 48.3,25.55 48.3,21.264 47.25,21.264 47.25,20.25 47.25,18.725 47,18.475 45.9,18.475
NetC16_1 on L1 "NETC16_1_L01_P061" (solid, pour order 61): 44.975,16.3 45.9,17.225 45.9,17.525 47,17.525 47,16.975 46.5,16.475 46.5,14.2 45.4,13.1 39.9,13.1 38.98,14.02 38.98,18.4 39.96,18.4 39.96,17.34 41,16.3
GND on L1 "GND_L01_P060" (solid, pour order 60): 57.2,25.6 57.3,25.5 58.4,25.5 58.925,24.975 59.825,24.975 59.825,24.025 58.775,24.025 58.775,24.125 58.3,24.6 55.8,24.6 55.4,25 55.4,28.2 55.2,28.4 54.4,28.4 54.375,28.425 51.2,28.425 51.2,29.375 51.325,29.5 57,29.5 57.2,29.3
P16V0 on L1 "P16V0_L01_P059" (solid, pour order 59): 58.15,22.15 57.136,22.15 57.136,23.2 53.864,23.2 53.864,22.265 53.864,22.15 52.85,22.15 52.85,23.575 51.925,24.5 50.675,24.5 50.675,27.25 51.2,27.775 53.825,27.775 54.4,27.2 55.2,27.2 55.2,26.4 54.1,26.4 53.8,26.1 53.8,24.8 54.45,24.15 58.15,24.15
GND on L1 "GND_L01_P056" (solid, pour order 56): 42.9,2.825 42.9,1.4 43.1,1.2 49.8,1.2 50,1.4 50,2.825
INTVCC on L1 "INTVCC_L01_P055" (solid, pour order 55): 16.475,23.5 16.44,23.465 16.44,21.39 16.505,21.325 19.35,21.325 19.35,22.175 18.925,22.175 17.6,23.5 17.125,23.5
GND on L1 "GND_L01_P054" (solid, pour order 54): 12.74,19.79 15.89,19.79 16.16,20.06 16.16,22.44 15.425,23.175 15.425,27.675 14.89,28.21 12.94,28.21 12.94,27.59 13.775,26.755 13.775,22.325 13.35,21.9 13.35,20.95 12.74,20.34
GND on L1 "GND_L01_P053" (solid, pour order 53): 61.375,28.8 61.375,29.425 60.775,30.025 59.475,30.025 59.475,30.975 61.325,30.975 61.925,30.375 61.925,28.8
GND on L1 "GND_L01_P052" (solid, pour order 52): 65.533,26.756 65.552,26.775 67.3,26.775 67.3,33.1 66.69,33.71 63.68,33.71 63.68,33.09 64.91,33.09 66.225,31.775 66.225,28.75 65.5,28.025 65.5,26.775
NetC27_1 on L1 "NETC27_1_L01_P050" (solid, pour order 50): 61.375,38.6 61.295,38.68 61.295,44.8 62.8,44.8 63,44.6 63,42 63.6,41.4 65.75,41.4 65.75,40.4 65.6,40.25 65.6,39.1 65.1,38.6
NetIC14_1 on L1 "NETIC14_1_L01_P049" (solid, pour order 49): 65.975,38.55 67.425,38.55 67.425,41.225 67.25,41.4 66.25,41.4 66.25,40.25 65.975,39.975 65.975,38.7
P5V0_REF on L1 "P5V0_REF_L01_P047" (solid, pour order 47): 70.7,50.55 70.7,51.2 70.2,51.7 66.51,51.7 66.22,51.41 66.22,50.79 65.64,50.79 65.64,51.64 66.2,52.2 66.6,52.2 66.9,52.5 73.2,52.5 73.72,51.98 73.72,51.81 73.72,51.19 73.8,51.11 73.8,49.25 73.35,49.25 73.35,50.85 73.2,51 72.4,51 72.225,50.825 71.95,50.55
GND on L1 "GND_L01_P046" (solid, pour order 46): 72.7,50.75 72.7,50.5 72.25,50.05 70.7,50.05 70.7,49.05 72.35,47.4 73,47.4 74,46.4 74,44.85 74.225,44.85 75.025,44.05 75.025,43.2 76.5,43.2 77,43.7 77,50.075 75.625,50.075 75.1,50.6 75.1,50.75 74.65,50.75 74.65,49.05 74.4,48.8 73.4,48.8 73.15,49.05 73.15,50.75
P5V4A on L1 "P5V4A_L01_P045" (solid, pour order 45): 70.375,38.55 72,38.55 72.39,38.94 73.01,38.94 73.27,39.2 76.825,39.2 77,39.375 77,41.9 76.19,42.71 74.76,42.71 74.375,43.095 74.375,44.2 73.8,44.775 73.8,46.35 73.35,46.35 73.35,43.275 73.425,43.2 73.69,43.2 74.18,42.71 74.18,41.48 73.4,40.7 70.7,40.7 70.375,40.375
P15V0 on L1 "P15V0_L01_P044" (solid, pour order 44): 60.39,27.61 60.6,27.4 60.6,25.8 60.425,25.625 58.775,25.625 58.45,25.95 58.45,26.2 58.25,26.4 57.4,26.4 57.4,27.2 58.2,27.2 58.7,26.7 59.39,26.7 59.68,26.99 59.68,27.61
N15V0 on L1 "N15V0_L01_P042" (solid, pour order 42): 61.925,31.5 59.6,31.5 59.475,31.625 59.475,33.375 59.81,33.71 61.52,33.71 61.52,33.005 61.925,32.6
N16V0 on L1 "N16V0_L01_P041" (solid, pour order 41): 62.05,23.95 62.05,28.525 62.325,28.8 62.325,29.9 63,29.9 64.6,31.5 65.575,31.5 65.575,28.875 65,28.3 65,26.8 65.85,25.95 67.35,25.95 67.35,23.95 66.336,23.95 66.336,25 63.064,25 63.064,23.95
NetC86_2 on L1 "NETC86_2_L01_P040" (solid, pour order 40): 62.05,22.45 62.05,19.85 62.4,19.5 67,19.5 67.35,19.85 67.35,22.45 66.336,22.45 66.336,21.4 63.064,21.4 63.064,22.45
NetC72_2 on L1 "NETC72_2_L01_P039" (solid, pour order 39): 54.45,12.4 54.45,14.2 54.075,14.575 54.075,17.975 54.75,18.65 58.15,18.65 58.15,19.6 52.85,19.6 52.25,19 52.25,12.4
GND on L1 "GND_L01_P038" (solid, pour order 38): 60.25,6.95 60.25,7.4 64.225,7.4 64.425,7.6 64.425,8.6 65.375,8.6 65.375,5.7 64.425,5.7 64.425,6.7 64.175,6.95 61.75,6.95
P12V0 on L1 "P12V0_L01_P037" (solid, pour order 37): 66.825,10.284 66.825,9.125 66.604,8.904 62.4,8.904 61.75,8.254 60.25,8.254 60.25,10.004 62,10.004 62.28,10.284
NetD4_1 on L1 "NETD4_1_L01_P036" (solid, pour order 36): 60.25,10.2 60.25,10.95 59.85,11.35 56.35,11.35 56.35,12.3 60.636,12.3 61.65,13.313 61.65,13.35 62.15,13.85 62.15,14.1 64.35,14.1 64.35,12.7 62.4,12.7 61.75,12.05 61.75,10.2
NetC86_2 on L1 "NETC86_2_L01_P035" (solid, pour order 35): 66.35,12.7 66.35,16.05 66.325,16.075 62.675,16.075 62.5,15.9 62.5,15.1 62.7,14.9 64.95,14.9 65.35,14.5 65.35,12.7
GND on L1 "GND_L01_P034" (solid, pour order 34): 62.48,16.5 61.63,15.65 61.63,14.85 60.616,14.85 60.616,15.9 57.344,15.9 57.344,14.85 57.069,14.575 56.355,14.575 55.93,14.15 55.93,10.2 54.43,10.2 54.43,11.45 54.78,11.8 54.78,14.5 54.705,14.575 54.705,17.725 55.08,18.1 66.8,18.1 67.5,17.4 67.5,11.5 66.8,10.8 62.555,10.8 62.555,11.988 62.667,12.1 66.38,12.1 66.612,12.332 66.612,16.388 66.5,16.5
NetD3_2 on L1 "NETD3_2_L01_P033" (solid, pour order 33): 53.65,11.615 53.65,10.55 54.2,10 55.95,10 55.95,9.55 54.05,9.55 52.985,10.615 50.55,10.615 50.35,10.815 50.35,13.8 51.25,13.8 51.25,12.15 51.785,11.615 52,11.615
NetIC17_3 on L1 "NETIC17_3_L01_P032" (solid, pour order 32): 50.75,9.585 50.75,8.585 53.885,8.585 54.2,8.9 55.95,8.9 55.95,9.35 53.85,9.35 53.615,9.585 53.45,9.585
GND on L1 "GND_L01_P031" (solid, pour order 31): 20.225,14.4 21.9,14.4 22.1,14.6 22.1,20.6 21.9,20.8 20.225,20.8
GND on L1 "GND_L01_P030" (solid, pour order 30): 19.1,31.575 19.1,29.9 19.3,29.7 25.3,29.7 25.5,29.9 25.5,31.575
GND on L1 "GND_L01_P024" (solid, pour order 24): 24.605,95.795 24.8,95.6 24.8,95.2 25.7,94.3 25.7,91.1 25.4,90.8 23.3,90.8 22.9,91.2 22.9,95.795
GND on L1 "GND_L01_P023" (solid, pour order 23): 6.5,93.4 6.7,93.2 10.1,93.2 10.3,93.4 10.3,97.5 10.1,97.7 6.7,97.7 6.5,97.5
VBUCK on L1 "VBUCK_L01_P020" (solid, pour order 20): 47.7,50.6 48.3,51.2 48.3,53.2 51.6,53.2 51.6,51.1 53.35,49.35 53.35,42.65 52.2,41.5 38.6,41.5 36.5,39.4 36.5,36.5 35.5,35.5 30.9,35.5 30.9,37 30.3,37.6 30.3,51.1 30.5,51.3 35.4,51.3 36.1,50.6
NetL5_2 on L1 "NETL5_2_L01_P019" (solid, pour order 19): 37.05,23.65 37.05,26.6 31.75,31.9 30.9,31.9 30.9,33.3 35.914,33.3 40,29.214 40,23.65
SW on L1 "SW_L01_P010" (solid, pour order 10): 31.75,15.45 32.3,16 32.3,27.6 31.75,28.15 28,28.15 28,25.4 27.56,24.96 26.125,24.96 26.125,21.77 26.55,21.345 26.55,15.45
GND on L1 "GND_L01_P009" (solid, pour order 9): 37.1,13.375 37.1,11.7 37.2,11.6 38.8,11.6 38.9,11.7 38.9,13.375
GND on L1 "GND_L01_P008" (solid, pour order 8): 34.7,13.375 34.7,11.7 34.8,11.6 36.4,11.6 36.5,11.7 36.5,13.375
P12V0 on L1 "P12V0_L01_P007" (solid, pour order 7): 50,3.575 50,3.2 49.9,3.1 43,3.1 42.9,3.2 42.9,4.625 44.075,5.8 45.7,5.8 46.5,6.6 46.5,9.1 47.4,10 50,10
NetC57_1 on L1 "NETC57_1_L01_P006" (solid, pour order 6): 39.75,7.255 40.345,7.255 40.9,6.7 43.3,6.7 43.6,7 43.6,10.4 43.24,10.76 40.89,10.76 40.89,10.14 41.51,10.14 42,9.65 42,7.8 41.705,7.505 39.75,7.505
GND on L1 "GND_L01_P005" (solid, pour order 5): 37.95,6.6 39.4,6.6 39.875,6.125 39.875,5.31 40.125,5.31 40.125,6.575 40.15,6.6 40.15,7 38.05,7 37.79,7.26 27.96,7.26 27.375,6.675 27.375,4.2 36.175,4.2 36.5,4.525 36.5,5.19 36.99,5.68 37.61,5.68 37.61,6.26
VIN+ on L1 "VIN+_L01_P004" (solid, pour order 4): 14.35,18.35 14,18 14,13.2 14.2,13 17.8,13 18,13.2 18,17.9 17.55,18.35 17.25,18.35
VIN- on L1 "VIN-_L01_P003" (solid, pour order 3): 0.5,13 -0.1,13.6 -0.1,20.6 0.7,21.4 5.4,21.4 8.45,18.35 12.95,18.35 12.95,13.65 12.3,13
no net on L4 "BALANCE" (solid, pour order 99): -2.036,10.284 -0.05,8.299 -0.05,0 0,-0.05 29.182,-0.05 66.577,-0.05 66.612,-0.036 67.906,1.258 67.92,1.293 67.92,30.95 78,30.95 78.05,31 78.05,98.724 78.036,98.76 76.76,100.035 76.725,100.05 29.182,100.05 0.001,100.05 -0.05,100 -0.05,92.021 -2.036,90.036 -2.05,90
P2V5_REF on L4 "P2V5_REF_L04_P098" (solid, pour order 98): 25.1,38.7 25.5,38.3 27,38.3 27.4,38.7 27.4,51.7 27.8,52.1 34.1,52.1 36.5,49.7 56.7,49.7 57,50 57,52.6 56.6,53 39.6,53 37.7,54.9 26.4,54.9 25.1,53.6
VIN+ on L4 "VIN+_L04_P097" (solid, pour order 97): 18,15.7 16.9,16.8 9.1,16.8 3.9,22 3.9,25.6 3.2,26.3 0.2,26.3 -0.4,25.7 -0.4,13.5 0.1,13 17.8,13 18,13.2
P15V0 on L4 "P15V0_L04_P096" (solid, pour order 96): 13.5,41.7 17.6,45.8 17.6,53.9 26.3,62.6 37.4,62.6 37.9,62.1 42.6,62.1 43.5,61.2 46,61.2 48.5,58.7 69.8,58.7 70.7,57.8 70.7,55.5 70.8,55.4 70.4,55 38.7,55 37.1,56.6 37.1,58.633 36.027,59.706 33.794,59.706 33.3,60.2 29.8,60.2 28.3,58.7 25.7,58.7 21.6,54.6 21.6,40.1 16.5,35 9.8,35 9.7,35.1 9.7,35.6 9.8,35.7 11.2,35.7 11.4,35.9 11.4,36.4 11.1,36.7 9.1,36.7 7.6,35.2 7.6,33.25 8.29,32.56 8.91,32.56 8.91,31.94 8.674,31.94 8.3,31.566 8.3,31.2 8.95,30.55 10.95,30.55 12,31.6 17.2,31.6 18.2,32.6 57.1,32.6 58.6,31.1 59.8,31.1 61.4,29.5 61.4,26.1 60.9,25.6 58.1,25.6 57.3,26.4 55.6,26.4 52.9,29.1 13.5,29.1 12.6,28.2 4.6,28.2 2.9,29.9 2.9,39 5.6,41.7
N15V0 on L4 "N15V0_L04_P095" (solid, pour order 95): 58.8,31.8 57.6,33 17.8,33 16.74,31.94 9.29,31.94 9.29,32.56 9.96,32.56 11.7,34.3 16.7,34.3 22.3,39.9 22.3,54.5 26.1,58.3 28.6,58.3 29.7,59.4 35.9,59.4 36.3,59 36.3,56 35.9,55.6 26.3,55.6 24.4,53.7 24.4,38.9 26.9,36.4 32.8,36.4 34,37.6 34,40.3 41.7,48 56.5,48 60.2,51.7 61.8,51.7 62.3,51.2 62.3,49.7 58.8,46.2 58.8,44.2 62.1,40.9 62.1,32.8 61.1,31.8 60.8,31.8
NetR3_1 on L4 "NETR3_1_L04_P090" (solid, pour order 90): 48.7,60.1 49,59.8 55.7,59.8 56,60.1 56,81.1 55.7,81.4 49,81.4 48.7,81.1
VBUCK on L4 "L1-GND 2" (solid, pour order 87): 32.075,37.5 30.4,37.5 30.3,37.6 30.3,44.8 30.3,46.4 30.3,49.6 30.3,51.2 30.4,51.3 32.075,51.3 32.075,46.5
GND on L4 "L1-GND 2" (solid, pour order 86): 27.925,51.3 29.6,51.3 29.7,51.2 29.7,44 29.7,42.4 29.7,39.2 29.7,37.6 29.6,37.5 27.925,37.5 27.925,42.3
NetC86_2 on L4 "NETC86_2_L04_P073" (solid, pour order 73): 62.5,15.8 62,16.3 62,19.9 62.5,20.4 67.1,20.4 67.4,20.1 67.4,15.4 66.9,14.9 62.7,14.9 62.5,15.1 62.5,15.7
I_OUT_P on L2 "I_OUT_P_L02_P017" (solid, pour order 17): 55,64 56.1,65.1 56.1,85.6 55.4,86.3 50.3,86.3 45.5,91.1 27.5,91.1 13.4,77 0,77 -0.5,76.5 -0.5,68.5 0.5,67.5 37.1,67.5 37.7,68.1 40.9,68.1 45,64
GND on L2 "GND_L02_P078" (solid, pour order 78): -2.036,10.284 -0.05,8.299 -0.05,0 0,-0.05 29.182,-0.05 66.577,-0.05 66.612,-0.036 67.906,1.258 67.92,1.293 67.92,30.95 78,30.95 78.05,31 78.05,98.724 78.036,98.76 76.76,100.035 76.725,100.05 29.182,100.05 0.001,100.05 -0.05,100 -0.05,92.021 -2.036,90.036 -2.05,90
I_OUT_N on L2 "I_OUT_N_L02_P018" (solid, pour order 18): 12.885,96.385 12.885,94.985 10.1,92.2 6.7,92.2 -0.5,85 -0.5,78.5 0,78 12.9,78 22.25,87.35 22.25,97.185 13.685,97.185 12.9,96.4
VIN+ on L3 "VIN+_L03_P027" (solid, pour order 27): 18,13.2 18,15.7 16.9,16.8 9.1,16.8 3.9,22 3.9,25.6 3.2,26.3 0.2,26.3 -0.4,25.7 -0.4,13.5 0.1,13 17.8,13
GND on L3 "GND_L03_P079" (solid, pour order 79): -2.036,10.284 -0.05,8.299 -0.05,0 0,-0.05 29.182,-0.05 66.577,-0.05 66.612,-0.036 67.906,1.258 67.92,1.293 67.92,30.95 78,30.95 78.05,31 78.05,98.724 78.036,98.76 76.76,100.035 76.725,100.05 29.182,100.05 0.001,100.05 -0.05,100 -0.05,92.021 -2.036,90.036 -2.05,90

## Keep-outs
Keep-Out Layer:
  drawing of 5078 lines, arcs and shapes, not listed

## Other copper
L1:
  pour cut-out: 33.85,82.644 cw(c33.85,84.3) 32.194,84.3 cw(c33.85,84.3) 33.85,85.956 cw(c33.85,84.3) 35.506,84.3 cw(c33.85,84.3)
  pour cut-out: 39.182,61.895 cw(c39.182,65) 36.077,65 cw(c39.182,65) 39.182,68.105 cw(c39.182,65) 42.286,65 cw(c39.182,65)
  pour cut-out: 39.182,81.895 cw(c39.182,85) 36.077,85 cw(c39.182,85) 39.182,88.105 cw(c39.182,85) 42.286,85 cw(c39.182,85)
  pour cut-out: 33.725,71.074 cw(c33.725,72.6) 32.199,72.6 cw(c33.725,72.6) 33.725,74.126 cw(c33.725,72.6) 35.251,72.6 cw(c33.725,72.6)

## Silkscreen, mask and mechanical layers (free items; w line width, h text height)
Top Overlay:
  drawing of 6 lines, arcs and shapes, not listed
  text "rev .Revision" at 39.495,76.797 h1.02
  text "WUT ISE 2026" at 39.495,74.997 h1.02
  text "COIL-BOOST-10A-XX" at 39.4,72.6 h1.5
Bottom Overlay:
  text "OCP" at 3.6,84.8 h1.02
  text "OTP" at 3.6,81.9 h1.02
Mechanical 1:
  lines w0.1: 67.87,4.318 67.87,31 78,31 78,98.724 76.725,100 75.682,100 63.783,100 29.182,100 0,100 0,92 -1,91 -2,90 -2,10.32 0,8.32 0,0 29.182,0 66.577,0 67.87,1.293 67.87,4.463
  lines w0.5: 36.2,32.2 36.2,60.6